# Altium PCB PCB2.PcbDoc
Units mm, origin at the board's own origin, x right, y up, seen from the top; angles counter-clockwise.
Board outline 22.61 x 19.3 mm, 2 copper layers (Top Layer, Bottom Layer); 10 components, 7 nets, 23 pads, 0 vias.
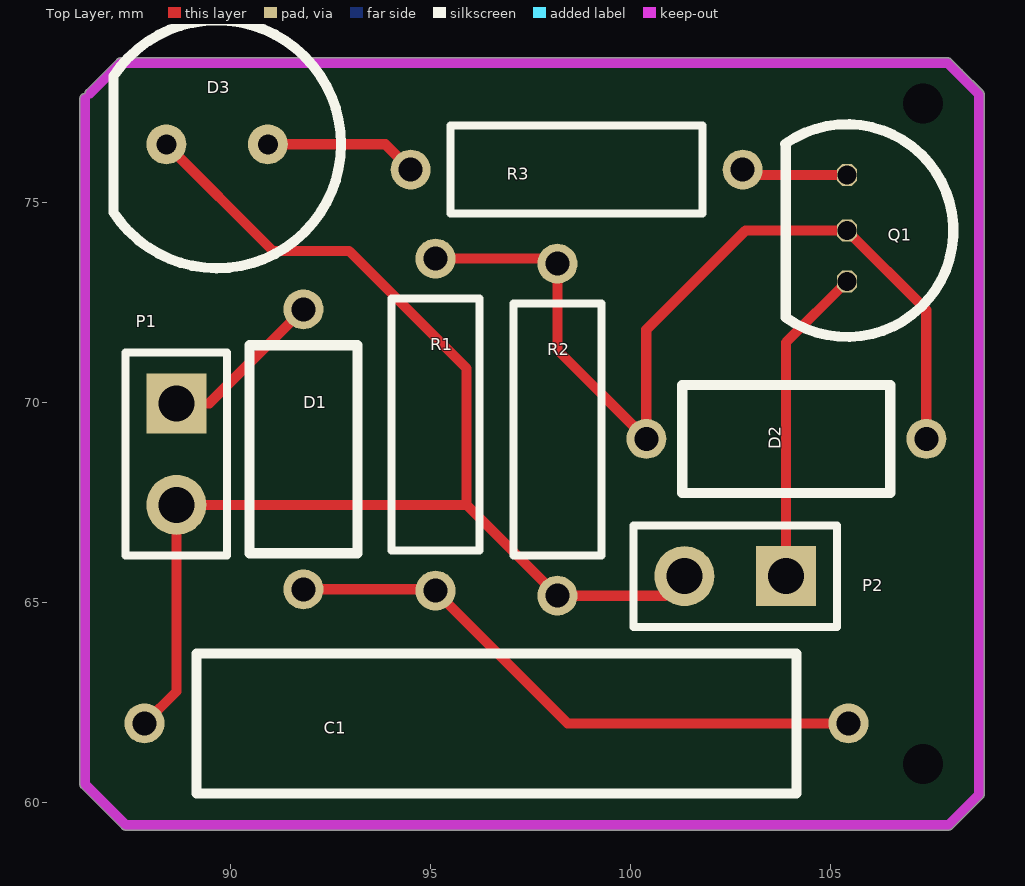
[diagram p0: Top Layer view]
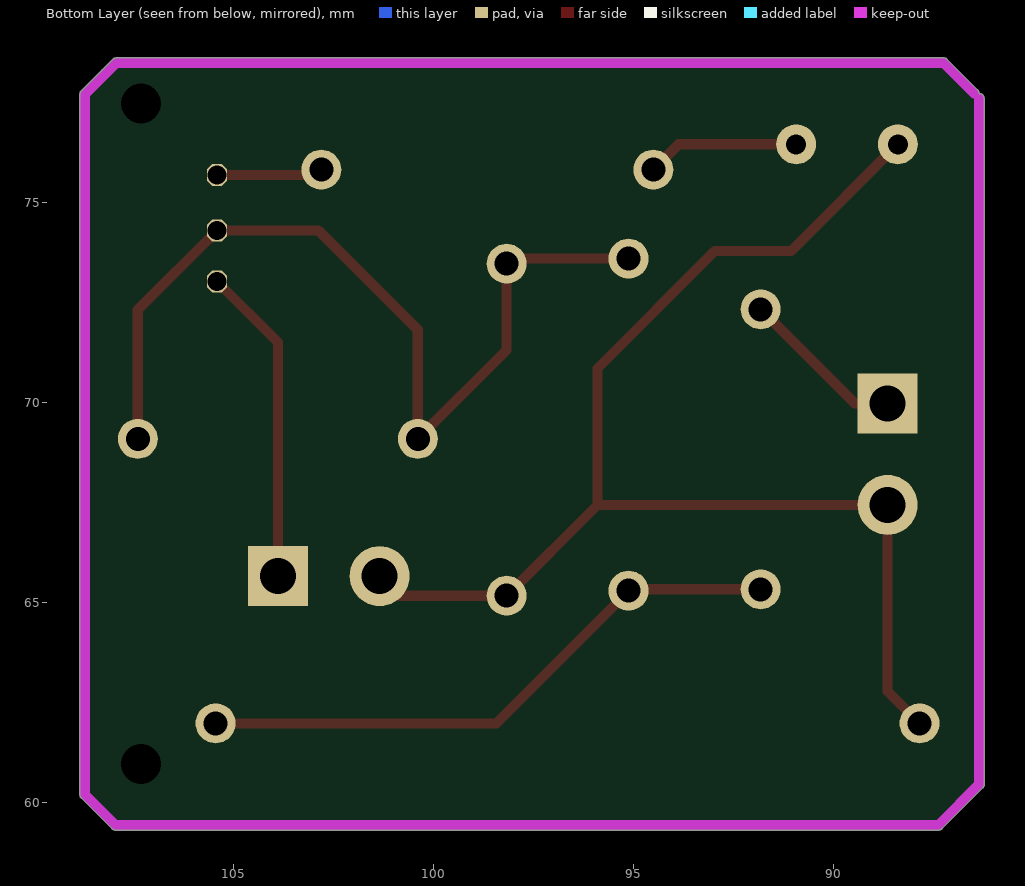
[diagram p1: Bottom Layer view, seen from below]

## Layer stack, top to bottom
Top Solder: solder mask 0.0102, Solder Resist, Dk 3.5
Top Layer: signal copper 0.0356
Dielectric 1: dielectric 0.32, FR-4, Dk 4.8
Bottom Layer: signal copper 0.0356
Bottom Solder: solder mask 0.0102, Solder Resist, Dk 3.5

## Board outline
86.27,60.361 cw(c86.36,60.452) 86.233,60.452 86.233,77.597 cw(c86.36,77.597) 86.36,77.724 cw(c86.487,77.724) 86.397,77.814 87.159,78.576 87.158,78.576 cw(c87.249,78.486) 87.249,78.613 107.926,78.613 cw(c107.926,78.486) 108.016,78.576 108.278,78.314 ccw(c108.188,78.224) 108.278,78.314 ccw(c108.188,78.224) 108.278,78.315 108.278,78.314 108.802,77.79 cw(c108.712,77.7) 108.839,77.7 108.839,60.198 cw(c108.712,60.198) 108.802,60.107 108.802,60.108 108.04,59.346 108.041,59.346 cw(c107.95,59.436) 107.95,59.309 87.376,59.309 cw(c87.376,59.436) 87.285,59.346 87.286,59.346

## Design rules (kind name [scope] priority, off if disabled: settings)
Clearance [All] p1: gap=0.254 ignorepadtopadclearanceinfootprint=FALSE except(0: Arc-Hole Track-Hole SMDPad-Hole THPad-Hole Via-Hole Fill-Hole Poly-Hole Region-Hole Text-Hole)
PolygonConnect [All] p1: connectstyle=Relief reliefconductorwidth=0.254 reliefentries=4 polygonreliefangle="90 Angle" airgapwidth=0.254
RoutingVias [All] p1: holewidth=0.711 width=1.27 viastyle="Through Hole" minholewidth=0.711 minwidth=1.27 maxholewidth=0.711 maxwidth=1.27
SolderMaskExpansion [All] p1: expansion=0.102
Width [All] p1: maxlimit=0.254 minlimit=0.254 preferedwidth=0.254
30 further rules are at their usual default settings.

## Components (designator, comment, footprint, x,y, rotation, side; value= is the part's Value field where it differs from the comment)
C1 "Cap" KONDENZATOR 96.647,61.976 r0 top value=10uF
D1 "1N4004" DIODE 91.821,71.628 r270 top
D2 "1N4004" DIODE 101.092,69.088 r0 top
D3 "LED" "LED DIODA" 89.662,76.454 r180 top
P1 "Header 2" HDR1X2 88.646,69.977 r270 top
P2 "Header 2" HDR1X2 103.886,65.659 r180 top
Q1 "PNP" PNP 105.41,75.685 r270 top
R1 "Res1" OTPORNIK 95.123,66.294 r90 top value=33
R2 "Res1" OTPORNIK 98.171,66.167 r90 top value=4k7
R3 "Res1" OTPORNIK 95.504,75.819 r0 top value=10

## Footprints (in the part's own frame and the unit in brackets; to place one, negate y for a bottom-side part, rotate by r counter-clockwise, add the part's x,y. Pads: shape width x height; smd on the part's side, far side on the other; paste and mask are expansions set on the pad)
DIODE [mm]
  round 1 hole 0.6: A(-0.7,0) K(6.3,0)
  silkscreen extent 0.2,-1.35 5.4,1.35
HDR1X2 [mm] "Connector; Header; 2 Position"
  rect 1.5x1.5 hole 0.9: 1(0,0)
  round 1.5 hole 0.9: 2(2.54,0)
  silkscreen extent -1.27,-1.27 3.81,1.27
KONDENZATOR [mm]
  round 1 hole 0.6: 12(-8.8,0) 13(8.8,0)
  silkscreen extent -7.5,-1.75 7.5,1.75
"LED DIODA" [mm]
  round 1 hole 0.5: A(-1.27,0) K(1.27,0)
  silkscreen extent -3.1,-3.1 2.59,3.1
OTPORNIK [mm]
  round 1 hole 0.6: 1(-1,0) 2(7.3,0)
  silkscreen extent 0,-1.1 6.3,1.1
PNP [mm]
  oct 0.55x0.5 hole 0.48: 1(0,0) 2(1.39,0) 3(2.66,0)
  silkscreen extent -1.27,-1.54 4.05,2.66

## Part data
C1: "Capacitor", LatestRevisionDate=17-Jul-2002, LatestRevisionNote="Re-released for DXP Platform.", PackageDescription="Radial Cap, Thru-Hole; 2 Leads; 0.3 in Pin Spacing", PackageReference=RAD-0.3, Published=8-Jun-2000, Publisher="Altium Limited"
D1 D2: library part "Diode 1N4004", "1 Amp General Purpose Rectifier", Code_JEDEC=DO-204-AL, ComponentLink1Description="Manufacturer Link", ComponentLink1URL=http://www.fairchildsemi.com/, ComponentLink2Description=Datasheet, ComponentLink2URL=http://www.fairchildsemi.com/ds/1N%2F1N4001.pdf, DatasheetVersion=1998, LatestRevisionDate=17-Jul-2002, LatestRevisionNote="Re-released for DXP Platform.", PackageDescription="Diode, Axial; Body 5.2 x 2.7 mm (LxDia. max), Lead Dia. 0.86 mm (max)", PackageReference=DO-41, PackageVersion=Aug-1999, Published=8-Jun-2000, Publisher="Altium Limited"
D3: library part LED1, "Typical RED GaAs LED", LatestRevisionDate=08-Jul-2005, LatestRevisionNote="Mech Layer 1 removed.", PackageDescription="LED; 2 Leads", PackageReference=LED-1, Published=8-Jun-2000, Publisher="Altium Limited"
P1 P2: "Header, 2-Pin", LatestRevisionDate=17-Jul-2002, LatestRevisionNote="Re-released for DXP Platform.", Publisher="Altium Limited"
Q1: library part 2N3906, "PNP General Purpose Amplifier", ComponentLink1Description="Manufacturer Link", ComponentLink1URL=http://www.fairchildsemi.com/, ComponentLink2Description=Datasheet, ComponentLink2URL=http://www.fairchildsemi.com/ds/2N%2F2N3906.pdf, DatasheetVersion=1997, LatestRevisionDate=15-Jan-2003, LatestRevisionNote="PCB Footprint 'BCY-W3/D4.7' replaced", PackageDescription="TO, Flat Index; 3 In-Line, Axial Leads; Body Dia. 4.5mm; Leads 0.51 x 0.48 mm (max)", PackageReference=TO-92A, PackageVersion=Sep-1998, Published=8-Jun-2000, Publisher="Altium Limited"
R1 R2 R3: "Resistor", LatestRevisionDate=17-Jul-2002, LatestRevisionNote="Re-released for DXP Platform.", PackageDescription="Axial Device, Thru-Hole; 2 Leads; 0.3 in Pin Spacing", PackageReference=AXIAL-0.3, Published=8-Jun-2000, Publisher="Altium Limited"

## Free pads (board coordinates)
  round 0 hole 1: 2(107.315,77.47) 3(107.315,60.96)

## Nets (pads, with @x,y where several pads share a name; then routed paths per layer and width w, separated by ;. In a path a pad name is that pad's centre, name@x,y a point inside that pad or via, vN(x,y) a via of type N, cw(c..) or ccw(c..) an arc to the next point about the centre after c; other vN are vias at no path point)
GND: C1.12 D3.K P1.2 P2.2 R2.1 | length 32.9
  Top Layer w0.254: C1.12 88.646,62.775 P1.2 95.901,67.437 ; D3.K 91.059,73.787 92.964,73.787 95.901,70.85 95.901,67.437 ; P2.2 100.854,65.167 R2.1 95.901,67.437
NetC1_2: C1.13 D1.K R1.1 | length 15
  Top Layer w0.254: D1.K 95.073,65.328 98.425,61.976 C1.13
NetD1_1: D1.A P1.1 | length 4.1
  Top Layer w0.254: P1.1 89.47,69.977 D1.A
NetD2_1: D2.A D2.K Q1.2 R1.2 R2.2 | length 23.2
  Top Layer w0.254: R1.2 98.044,73.594 R2.2 98.171,71.309 D2.A 100.392,71.817 102.87,74.295 Q1.2 107.392,72.313 D2.K
NetD2_2: P2.1 Q1.3 | length 8
  Top Layer w0.254: P2.1 103.886,71.501 Q1.3
NetD3_1: D3.A R3.1 | length 3.8
  Top Layer w0.254: D3.A 93.869,76.454 R3.1
NetQ1_1: Q1.1 R3.2 | length 2.7
  Top Layer w0.254: R3.2 102.938,75.685 Q1.1

## Keep-outs
Keep-Out Layer:
  lines w0.254: 86.36,77.597 86.36,60.452 87.376,59.436 107.95,59.436 108.712,60.198 108.712,62.23 108.712,77.7 108.188,78.224 107.926,78.486 87.249,78.486 86.487,77.724